# Altium PCB qav90.PcbDoc (part 4 of 7)
Units mm, origin at the board's own origin, x right, y up, seen from the top; angles counter-clockwise.
Board outline 90 x 90 mm, 3 copper layers (Top Layer, Mid-Layer 1, Bottom Layer); 214 components, 77 nets, 727 pads, 256 vias.
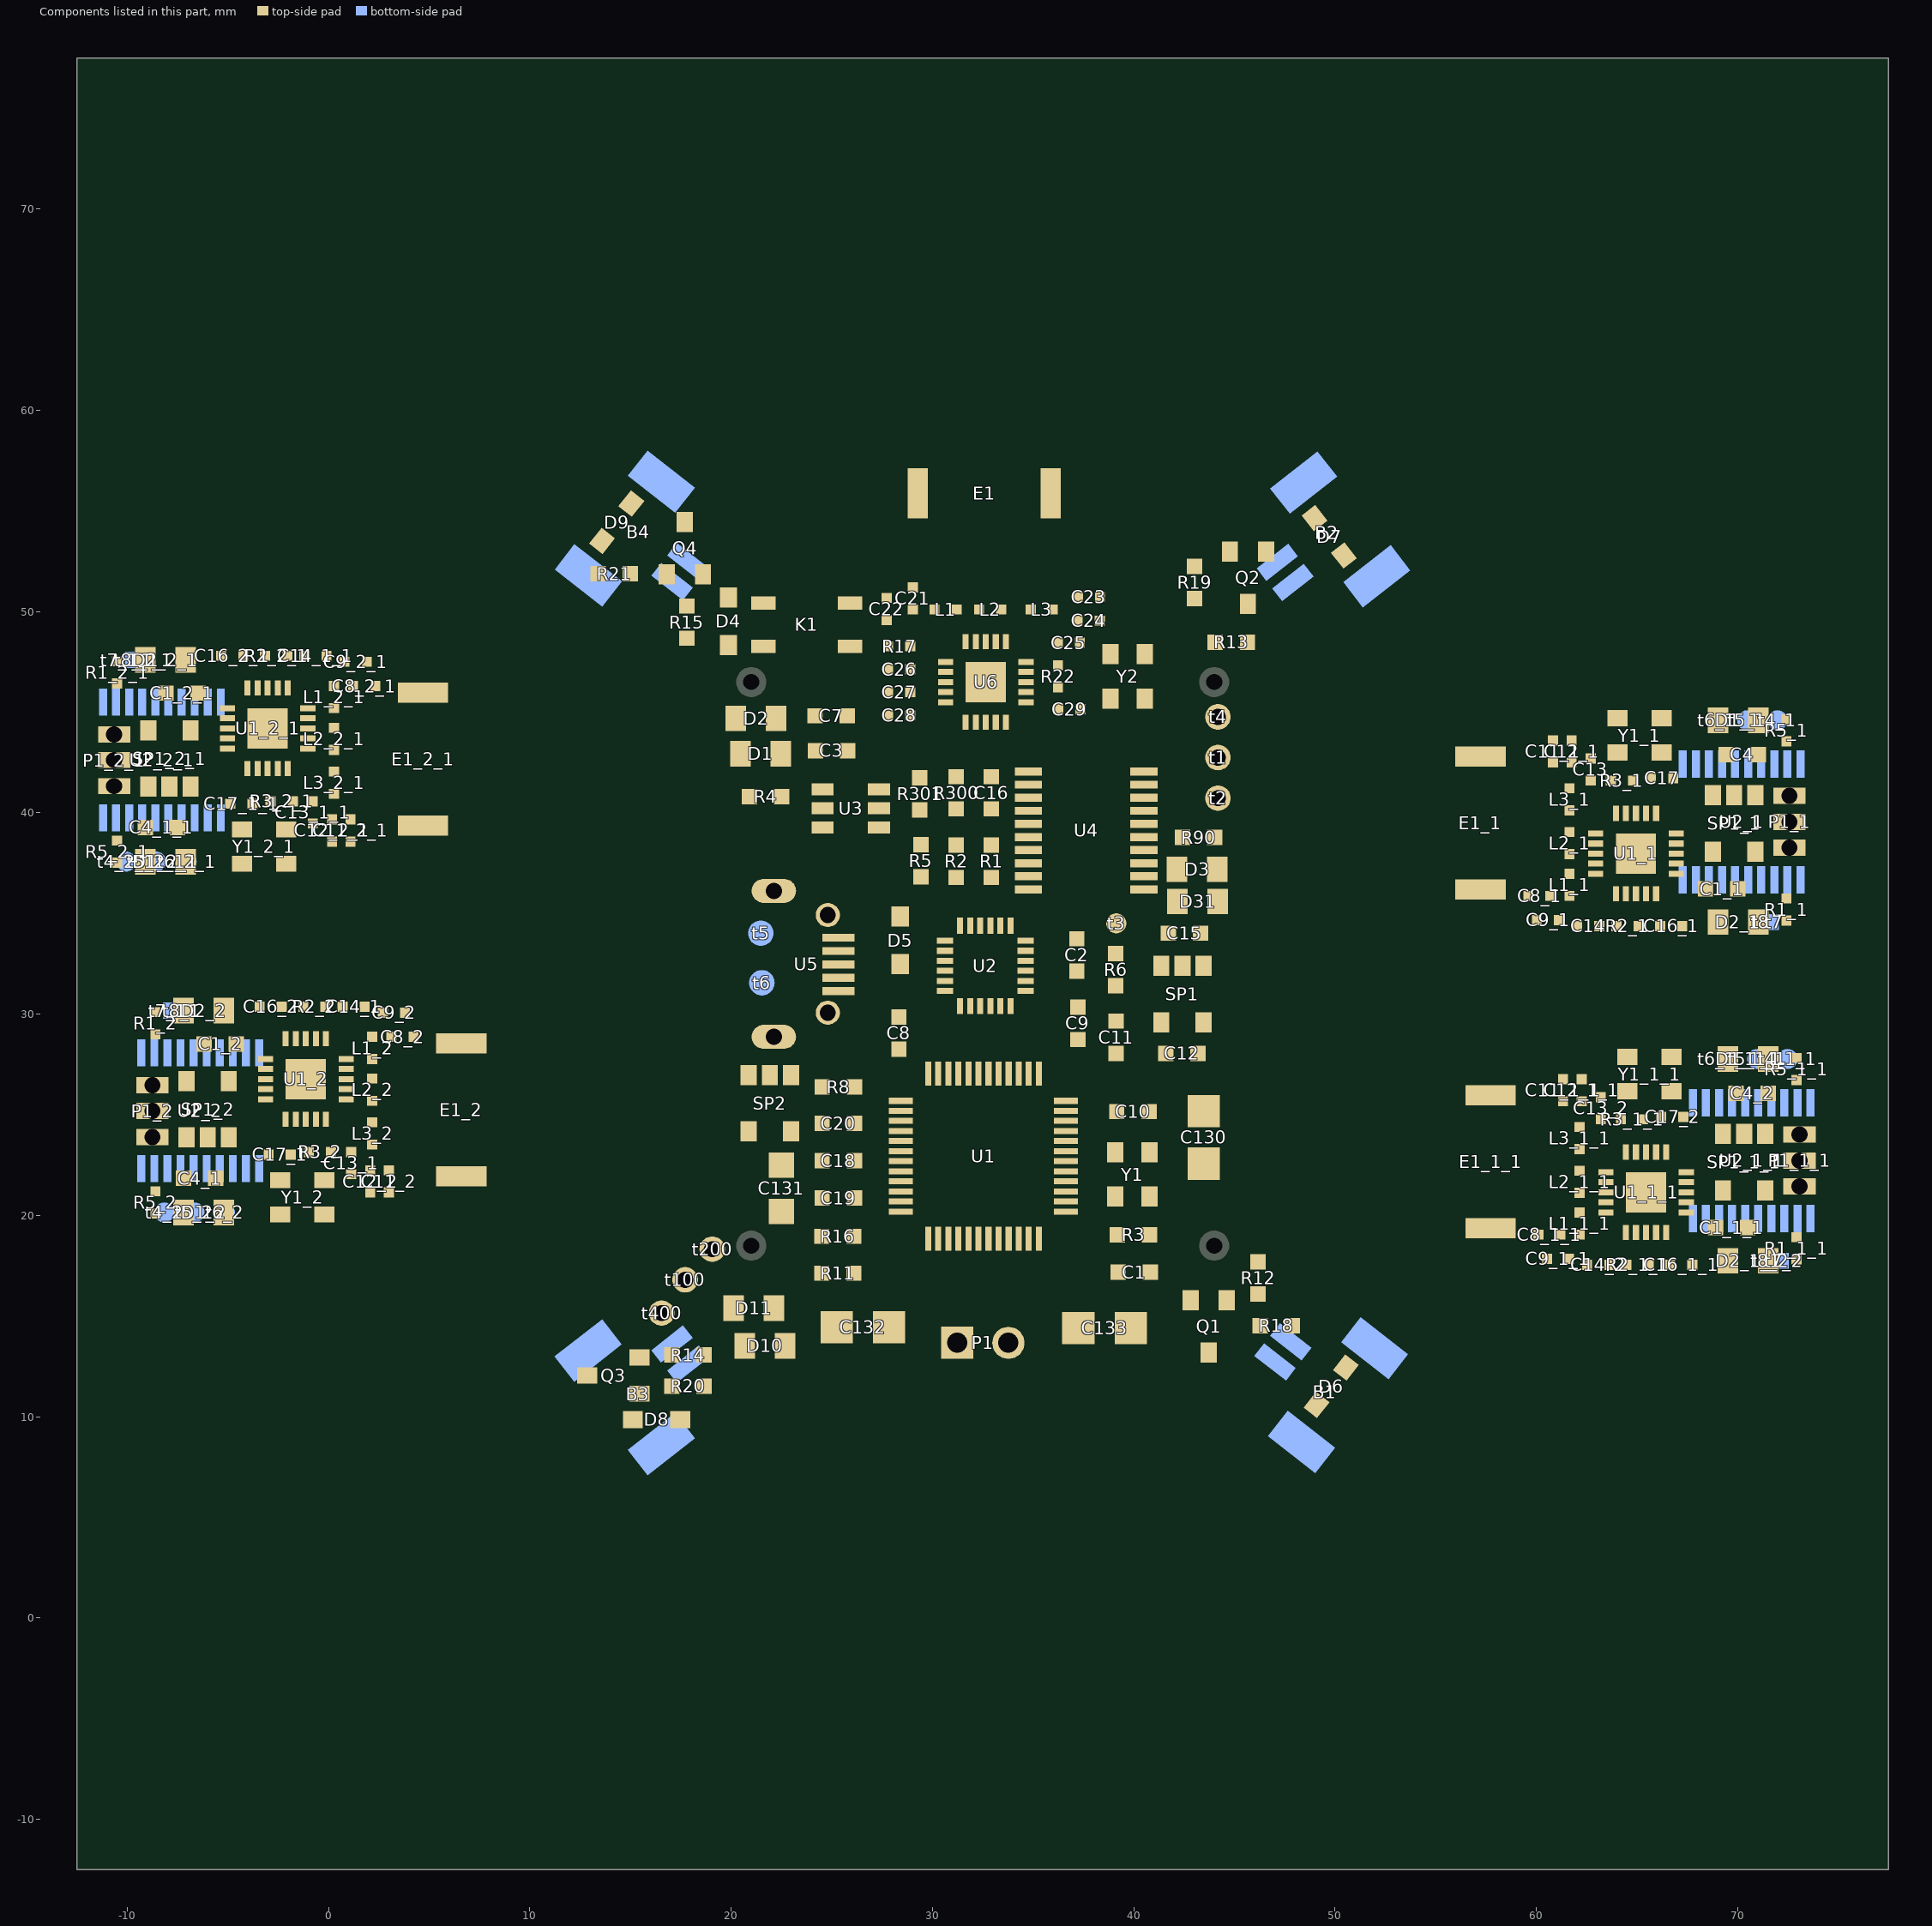
[diagram p4: the components of this part, seen from the top]

## Via types
v1: diameter 0.55, hole 0.25, Top Layer to Bottom Layer, tented both sides, 248 vias
v2: diameter 0.55, hole 0.25, Top Layer to Bottom Layer, 8 vias

## Nets (pads, with @x,y where several pads share a name; then routed paths per layer and width w, separated by ;. In a path a pad name is that pad's centre, name@x,y a point inside that pad or via, vN(x,y) a via of type N, cw(c..) or ccw(c..) an arc to the next point about the centre after c; other vN are vias at no path point) (continued)
copper on no net: (continued)
  Top Layer w0.254: v1@-11.134,46.971 -10.151,46.971 -9.78,46.6 -8.593,46.6 -8.582,46.61 -8.09,46.61 -7.1,47.6 ; -10.5,37.525 -9.425,37.525 -9.325,37.625 ; -10.5,38.625 -10.49,38.615 ; -10.5,47.525 -9.4,47.525 -9.325,47.6 ; v1@-9.234,29.546 -8.251,29.546 -7.88,29.175 -6.693,29.175 -6.682,29.185 -6.19,29.185 -5.2,30.175 ; -8.6,20.1 -7.525,20.1 -7.425,20.2 ; -8.6,21.2 -8.59,21.19 ; -8.6,30.1 -7.5,30.1 -7.425,30.175 ; -7.325,37.625 -6.875,37.175 v1@-5.95,37.175 ; v1(-6,40.575) -5.809,40.575 -5.2,41.184 -5.2,41.75 -5.021,41.929 -5.021,43.196 -5.025,43.2 ; v1@-5.875,41.425 -6.15,41.7 ; v1(-5.575,42.325) -5.679,42.429 -5.679,43.621 -5.6,43.7 -5.025,43.7 ; v1@-5.463,46.712 -5.815,46.36 -5.815,44.915 -5.6,44.7 -5.025,44.7 ; -5.425,20.2 -4.975,19.75 v1@-4.05,19.75 ; -5.025,44.2 -5.721,44.2 -6.15,43.771 -6.15,41.7 ; -5.025,45.2 -5.025,46.05 v1(-4.925,46.15) ; v1(-4.5,41.25) -4.475,41.274 -4.475,41.75 -4.025,42.2 ; -4.3,37.475 -3.15,38.625 -3.15,40.3 -2.875,40.575 ; -4.225,47.8 -4.225,47.75 -3.579,47.104 -3.579,46.254 -3.525,46.2 ; v1(-4.1,23.15) -3.909,23.15 -3.3,23.759 -3.3,24.325 -3.121,24.504 -3.121,25.771 -3.125,25.775 ; v1@-3.975,24 -4.25,24.275 -4.25,26.346 -3.821,26.775 -3.125,26.775 ; -3.775,40.45 -3.675,40.55 -2.9,40.55 -2.875,40.575 ; v1(-3.675,24.9) -3.779,25.004 -3.779,26.196 -3.7,26.275 -3.125,26.275 ; v1@-3.563,29.287 -3.915,28.935 -3.915,27.49 -3.7,27.275 -3.125,27.275 ; v1(-3.525,41.275) -3.525,42.2 ; v1(-3.15,47.775) v1@-3.15,47.8 ; -3.125,27.775 -3.125,28.625 v1(-3.025,28.725) ; -3.025,46.2 v1@-3.025,47 ; -2.994,40.179 cw(c-2.672,40.179) -2.819,40.466 ; v1(-2.6,23.825) -2.575,23.849 -2.575,24.325 -2.125,24.775 ; -2.525,42.2 -2.525,40.925 -2.875,40.575 ; -2.525,46.2 v1(-2.525,44.7) ; -2.4,20.05 -1.25,21.2 -1.25,22.875 -0.975,23.15 ; -2.325,30.375 -2.325,30.325 -1.679,29.679 -1.679,28.829 -1.625,28.775 ; -2.1,39.175 -1.775,39.5 -1.775,40.575 ; -2.05,47.8 -2.025,47.775 -2.025,46.2 ; -2.025,42.2 -2.025,40.825 -1.775,40.575 ; -1.875,23.025 -1.775,23.125 -1,23.125 -0.975,23.15 ; v1(-1.625,23.85) -1.625,24.775 ; v1(-1.25,30.35) v1@-1.25,30.375 ; -1.125,28.775 v1@-1.125,29.575 ; -1.094,22.754 cw(c-0.772,22.754) -0.919,23.041 ; -1.025,43.2 -1.025,41.9 -0.075,40.95 0.275,40.95 0.275,39.775 0.175,39.675 1.1,39.675 ; -1.025,43.7 -0.45,43.7 0.125,43.125 0.275,43.125 ; -1.025,44.2 0.25,44.2 0.275,44.225 ; -1.025,44.7 v1(-2.525,44.7) ; -0.775,40.575 -1.775,40.575 ; -0.625,24.775 -0.625,23.5 -0.975,23.15 ; -0.625,28.775 v1(-0.625,27.275) ; -0.2,21.75 0.125,22.075 0.125,23.15 ; -0.15,30.375 -0.125,30.35 -0.125,28.775 ; -0.125,24.775 -0.125,23.4 0.125,23.15 ; -0.089,41.146 ccw(c0.139,41.373) 0.237,41.067 ; 0.875,25.775 0.875,24.475 1.825,23.525 2.175,23.525 2.175,22.35 2.075,22.25 3,22.25 ; 0.875,26.275 1.45,26.275 2.025,25.7 2.175,25.7 ; 0.875,26.775 2.15,26.775 2.175,26.8 ; 0.875,27.275 v1(-0.625,27.275) ; 1.125,23.15 0.125,23.15 ; 1.811,23.721 ccw(c2.039,23.948) 2.137,23.642 ; 60.825,42.5 61.75,42.5 61.65,42.4 61.65,41.225 62,41.225 62.95,40.275 62.95,38.975 ; 61.325,25.675 62.25,25.675 62.15,25.575 62.15,24.4 62.5,24.4 63.45,23.45 63.45,22.15 ; 61.65,37.95 61.675,37.975 62.95,37.975 ; 61.65,39.05 61.8,39.05 62.375,38.475 62.95,38.475 ; 61.688,41.108 cw(c61.786,40.802) 62.014,41.029 ; 62.15,21.125 62.175,21.15 63.45,21.15 ; 62.15,22.225 62.3,22.225 62.875,21.65 63.45,21.65 ; 62.188,24.283 cw(c62.286,23.977) 62.514,24.204 ; 62.7,41.6 63.7,41.6 ; 62.95,37.475 v1(64.45,37.475) ; 63.2,24.775 64.2,24.775 ; 63.45,20.65 v1(64.95,20.65) ; 63.95,35.975 63.95,34.4 63.975,34.375 ; 63.95,39.975 63.95,41.35 63.7,41.6 ; 64.025,43 63.7,42.675 63.7,41.6 ; 64.45,19.15 64.45,17.575 64.475,17.55 ; 64.45,23.15 64.45,24.525 64.2,24.775 ; 64.45,35.975 v1(64.45,37.475) ; 64.45,39.975 64.45,41.25 64.8,41.6 ; 64.525,26.175 64.2,25.85 64.2,24.775 ; 64.744,41.709 ccw(c64.597,41.996) 64.919,41.996 ; 64.95,19.15 v1(64.95,20.65) ; 64.95,23.15 64.95,24.425 65.3,24.775 ; v1@64.95,35.175 64.95,35.975 ; v1@65.075,34.375 v1(65.075,34.4) ; 65.244,24.884 ccw(c65.097,25.171) 65.419,25.171 ; v1@65.45,18.35 65.45,19.15 ; 65.45,35.975 65.504,35.921 65.504,35.071 66.15,34.425 66.15,34.375 ; 65.45,39.975 v1(65.45,40.9) ; v1@65.575,17.55 v1(65.575,17.575) ; 65.7,41.725 65.6,41.625 64.825,41.625 64.8,41.6 ; 65.95,19.15 66.004,19.096 66.004,18.246 66.65,17.6 66.65,17.55 ; 65.95,23.15 v1(65.95,24.075) ; 65.95,39.975 66.4,40.425 66.4,40.901 v1(66.425,40.925) ; 66.2,24.9 66.1,24.8 65.325,24.8 65.3,24.775 ; 66.225,44.7 65.075,43.55 65.075,41.875 64.8,41.6 ; 66.45,23.15 66.9,23.6 66.9,24.076 v1(66.925,24.1) ; 66.725,27.875 65.575,26.725 65.575,25.05 65.3,24.775 ; v1(66.85,36.025) 66.95,36.125 66.95,36.975 ; 66.95,37.475 67.525,37.475 67.74,37.26 67.74,35.815 v1@67.388,35.463 ; 66.95,37.975 67.646,37.975 68.075,38.404 68.075,40.475 ; 66.95,38.475 67.525,38.475 67.604,38.554 67.604,39.746 v1(67.5,39.85) ; 66.95,38.975 66.946,38.979 66.946,40.246 67.125,40.425 67.125,40.991 67.734,41.6 v1@67.925,41.6 ; v1(67.35,19.2) 67.45,19.3 67.45,20.15 ; 67.45,20.65 68.025,20.65 68.24,20.435 68.24,18.99 v1@67.888,18.638 ; 67.45,21.15 68.146,21.15 68.575,21.579 68.575,23.65 ; 67.45,21.65 68.025,21.65 68.104,21.729 68.104,22.921 v1(68,23.025) ; 67.45,22.15 67.446,22.154 67.446,23.421 67.625,23.6 67.625,24.166 68.234,24.775 v1@68.425,24.775 ; v1@67.8,40.75 68.075,40.475 ; v1@68.3,23.925 68.575,23.65 ; 69.025,34.575 70.015,35.565 70.507,35.565 70.518,35.575 71.705,35.575 72.076,35.204 v1@73.059,35.204 ; 69.25,44.55 68.8,45 v1@67.875,45 ; 69.525,17.75 70.515,18.74 71.007,18.74 71.018,18.75 72.205,18.75 72.576,18.379 v1@73.559,18.379 ; 69.75,27.725 69.3,28.175 v1@68.375,28.175 ; 71.25,34.575 71.325,34.65 72.425,34.65 ; 71.25,44.55 71.35,44.65 72.425,44.65 ; 71.75,17.75 71.825,17.825 72.925,17.825 ; 71.75,27.725 71.85,27.825 72.925,27.825 ; 72.415,43.56 72.425,43.55 ; 72.915,26.735 72.925,26.725 ; v1@-11.045,46.845 cw(c-10.743,46.543) -10.743,46.971 ; v1@-11.045,46.845 cw(c-10.743,46.543) -10.743,46.971 ; v1@-11.045,46.845 cw(c-10.743,46.543) -10.743,46.971 ; v1@-11.045,47.055 ccw(c-10.843,47.257) -10.843,46.971 ; v1@-11.045,47.055 ccw(c-10.843,47.257) -10.843,46.971 ; v1@-11.045,47.055 ccw(c-10.843,47.257) -10.843,46.971 ; -10.413,37.438 cw(c-10.203,37.228) -10.203,37.525 ; -10.413,37.438 cw(c-10.203,37.228) -10.203,37.525 ; -10.413,37.438 cw(c-10.203,37.228) -10.203,37.525 ; -10.413,37.612 ccw(c-10.203,37.822) -10.203,37.525 ; -10.413,37.612 ccw(c-10.203,37.822) -10.203,37.525 ; -10.413,37.612 ccw(c-10.203,37.822) -10.203,37.525 ; -10.413,47.438 cw(c-10.203,47.228) -10.203,47.525 ; -10.413,47.438 cw(c-10.203,47.228) -10.203,47.525 ; -10.413,47.438 cw(c-10.203,47.228) -10.203,47.525 ; -10.413,47.612 ccw(c-10.203,47.822) -10.203,47.525 ; -10.413,47.612 ccw(c-10.203,47.822) -10.203,47.525 ; -10.413,47.612 ccw(c-10.203,47.822) -10.203,47.525 ; -10.145,47.525 cw(c-10.145,46.428) -9.369,47.204 ; -10.145,47.525 cw(c-10.145,46.428) -9.369,47.204 ; -10.145,47.525 cw(c-10.145,46.428) -9.369,47.204 ; -10.141,37.525 ccw(c-10.141,38.616) -9.369,37.844 ; -10.141,37.525 ccw(c-10.141,38.616) -9.369,37.844 ; -10.141,37.525 ccw(c-10.141,38.616) -9.369,37.844 ; -9.899,37.525 cw(c-9.899,36.776) -9.369,37.306 ; -9.899,37.525 cw(c-9.899,36.776) -9.369,37.306 ; -9.899,37.525 cw(c-9.899,36.776) -9.369,37.306 ; -9.894,47.525 ccw(c-9.894,48.267) -9.369,47.742 ; -9.894,47.525 ccw(c-9.894,48.267) -9.369,47.742 ; -9.894,47.525 ccw(c-9.894,48.267) -9.369,47.742 ; v1@-9.145,29.42 cw(c-8.843,29.118) -8.843,29.546 ; v1@-9.145,29.42 cw(c-8.843,29.118) -8.843,29.546 ; v1@-9.145,29.42 cw(c-8.843,29.118) -8.843,29.546 ; v1@-9.145,29.63 ccw(c-8.943,29.832) -8.943,29.546 ; v1@-9.145,29.63 ccw(c-8.943,29.832) -8.943,29.546 ; v1@-9.145,29.63 ccw(c-8.943,29.832) -8.943,29.546 ; -8.513,20.013 cw(c-8.303,19.803) -8.303,20.1 ; -8.513,20.013 cw(c-8.303,19.803) -8.303,20.1 ; -8.513,20.013 cw(c-8.303,19.803) -8.303,20.1 ; -8.513,20.187 ccw(c-8.303,20.397) -8.303,20.1 ; -8.513,20.187 ccw(c-8.303,20.397) -8.303,20.1 ; -8.513,20.187 ccw(c-8.303,20.397) -8.303,20.1 ; -8.513,30.013 cw(c-8.303,29.803) -8.303,30.1 ; -8.513,30.013 cw(c-8.303,29.803) -8.303,30.1 ; -8.513,30.013 cw(c-8.303,29.803) -8.303,30.1 ; -8.513,30.187 ccw(c-8.303,30.397) -8.303,30.1 ; -8.513,30.187 ccw(c-8.303,30.397) -8.303,30.1 ; -8.513,30.187 ccw(c-8.303,30.397) -8.303,30.1 ; -8.245,30.1 cw(c-8.245,29.003) -7.469,29.779 ; -8.245,30.1 cw(c-8.245,29.003) -7.469,29.779 ; -8.245,30.1 cw(c-8.245,29.003) -7.469,29.779 ; -8.241,20.1 ccw(c-8.241,21.191) -7.469,20.419 ; -8.241,20.1 ccw(c-8.241,21.191) -7.469,20.419 ; -8.241,20.1 ccw(c-8.241,21.191) -7.469,20.419 ; -7.999,20.1 cw(c-7.999,19.351) -7.469,19.881 ; -7.999,20.1 cw(c-7.999,19.351) -7.469,19.881 ; -7.999,20.1 cw(c-7.999,19.351) -7.469,19.881 ; -7.994,30.1 ccw(c-7.994,30.842) -7.469,30.317 ; -7.994,30.1 ccw(c-7.994,30.842) -7.469,30.317 ; -7.994,30.1 ccw(c-7.994,30.842) -7.469,30.317 ; -7.967,46.733 cw(c-7.1,45.866) -7.1,47.092 ; -7.967,46.733 cw(c-7.1,45.866) -7.1,47.092 ; -7.967,46.733 cw(c-7.1,45.866) -7.1,47.092 ; -7.661,47.039 ccw(c-8.094,47.473) -7.481,47.473 ; -7.661,47.039 ccw(c-8.094,47.473) -7.481,47.473 ; -7.661,47.039 ccw(c-8.094,47.473) -7.481,47.473 ; -7.534,47.166 cw(c-7.1,46.733) -7.1,47.346 ; -7.534,47.166 cw(c-7.1,46.733) -7.1,47.346 ; -7.534,47.166 cw(c-7.1,46.733) -7.1,47.346 ; -7.431,47.003 ccw(c-7.599,47.632) -6.979,47.434 ; -7.431,47.003 ccw(c-7.599,47.632) -6.979,47.434 ; -7.431,47.003 ccw(c-7.599,47.632) -6.979,47.434 ; -6.991,37.513 ccw(c-6.397,37.866) -6.397,37.175 ; -6.991,37.513 ccw(c-6.397,37.866) -6.397,37.175 ; -6.991,37.513 ccw(c-6.397,37.866) -6.397,37.175 ; -6.773,37.643 ccw(c-5.95,38.132) v1@-5.95,37.175 ; -6.773,37.643 ccw(c-5.95,38.132) v1@-5.95,37.175 ; -6.773,37.643 ccw(c-5.95,38.132) v1@-5.95,37.175 ; -6.307,37.175 cw(c-6.307,36.818) v1@-6.055,37.07 ; -6.307,37.175 ccw(c-6.307,37.532) v1@-6.055,37.28 ; -6.307,37.175 cw(c-6.307,36.818) v1@-6.055,37.07 ; -6.307,37.175 ccw(c-6.307,37.532) v1@-6.055,37.28 ; -6.307,37.175 cw(c-6.307,36.818) v1@-6.055,37.07 ; -6.307,37.175 ccw(c-6.307,37.532) v1@-6.055,37.28 ; -6.295,37.267 cw(c-6.388,36.922) v1@-6.078,37.101 ; -6.295,37.267 ccw(c-6.203,37.613) v1@-6.024,37.303 ; -6.295,37.267 cw(c-6.388,36.922) v1@-6.078,37.101 ; -6.295,37.267 ccw(c-6.203,37.613) v1@-6.024,37.303 ; -6.295,37.267 cw(c-6.388,36.922) v1@-6.078,37.101 ; -6.295,37.267 ccw(c-6.203,37.613) v1@-6.024,37.303 ; -6.295,37.267 cw(c-6.388,36.922) v1@-6.078,37.101 ; -6.295,37.267 ccw(c-6.203,37.613) v1@-6.024,37.303 ; -6.295,37.267 cw(c-6.388,36.922) v1@-6.078,37.101 ; -6.295,37.267 ccw(c-6.203,37.613) v1@-6.024,37.303 ; -6.295,37.267 cw(c-6.388,36.922) v1@-6.078,37.101 ; -6.295,37.267 ccw(c-6.203,37.613) v1@-6.024,37.303 ; -6.15,41.7 ccw(c-6.036,41.814) v1@-5.978,41.663 ; -6.15,41.7 ccw(c-6.036,41.814) v1@-5.978,41.663 ; -6.15,41.7 ccw(c-6.036,41.814) v1@-5.978,41.663 ; -6.15,41.812 ccw(c-5.638,41.812) v1@-6,41.45 ; -6.15,41.812 ccw(c-5.638,41.812) v1@-6,41.45 ; -6.15,41.812 ccw(c-5.638,41.812) v1@-6,41.45 ; -6.15,42.425 ccw(c-5.025,42.425) v1@-5.82,41.63 ; -6.15,42.425 ccw(c-5.025,42.425) v1@-5.82,41.63 ; -6.15,42.425 ccw(c-5.025,42.425) v1@-5.82,41.63 ; -6.07,42.063 cw(c-6.5,41.815) v1@-6.057,41.592 ; -6.07,42.063 cw(c-6.5,41.815) v1@-6.057,41.592 ; -6.07,42.063 cw(c-6.5,41.815) v1@-6.057,41.592 ; -6.067,29.308 cw(c-5.2,28.441) -5.2,29.667 ; -6.067,29.308 cw(c-5.2,28.441) -5.2,29.667 ; -6.067,29.308 cw(c-5.2,28.441) -5.2,29.667 ; v1@-6,40.723 ccw(c-6,41.54) -5.422,40.962 ; v1@-6,40.723 ccw(c-6,41.54) -5.422,40.962 ; v1@-6,40.723 ccw(c-6,41.54) -5.422,40.962 ; -5.761,29.614 ccw(c-6.194,30.048) -5.581,30.048 ; -5.761,29.614 ccw(c-6.194,30.048) -5.581,30.048 ; -5.761,29.614 ccw(c-6.194,30.048) -5.581,30.048 ; -5.745,46.43 ccw(c-6.041,46.725) v1@-5.623,46.725 ; -5.745,46.43 ccw(c-6.041,46.725) v1@-5.623,46.725 ; -5.745,46.43 ccw(c-6.041,46.725) v1@-5.623,46.725 ; -5.685,46.49 cw(c-5.475,46.28) v1@-5.475,46.577 ; -5.685,46.49 cw(c-5.475,46.28) v1@-5.475,46.577 ; -5.685,46.49 cw(c-5.475,46.28) v1@-5.475,46.577 ; -5.679,42.934 ccw(c-4.966,42.934) v1@-5.47,42.43 ; -5.679,42.934 ccw(c-4.966,42.934) v1@-5.47,42.43 ; -5.679,42.934 ccw(c-4.966,42.934) v1@-5.47,42.43 ; v1@-5.663,42.444 ccw(c-5.769,42.589) -5.614,42.678 ; v1@-5.663,42.444 ccw(c-5.769,42.589) -5.614,42.678 ; v1@-5.663,42.444 ccw(c-5.769,42.589) -5.614,42.678 ; -5.634,29.741 cw(c-5.2,29.308) -5.2,29.921 ; -5.634,29.741 cw(c-5.2,29.308) -5.2,29.921 ; -5.634,29.741 cw(c-5.2,29.308) -5.2,29.921 ; -5.531,29.578 ccw(c-5.699,30.207) -5.079,30.009 ; -5.531,29.578 ccw(c-5.699,30.207) -5.079,30.009 ; -5.531,29.578 ccw(c-5.699,30.207) -5.079,30.009 ; -5.091,20.088 ccw(c-4.497,20.441) -4.497,19.75 ; -5.091,20.088 ccw(c-4.497,20.441) -4.497,19.75 ; -5.091,20.088 ccw(c-4.497,20.441) -4.497,19.75 ; -5.025,45.551 cw(c-4.326,45.551) v1@-4.82,46.045 ; -5.025,45.551 cw(c-4.326,45.551) v1@-4.82,46.045 ; -5.025,45.551 cw(c-4.326,45.551) v1@-4.82,46.045 ; v1@-5.01,46.029 cw(c-5.108,45.889) -4.96,45.804 ; v1@-5.01,46.029 cw(c-5.108,45.889) -4.96,45.804 ; v1@-5.01,46.029 cw(c-5.108,45.889) -4.96,45.804 ; -4.873,20.218 ccw(c-4.05,20.707) v1@-4.05,19.75 ; -4.873,20.218 ccw(c-4.05,20.707) v1@-4.05,19.75 ; -4.873,20.218 ccw(c-4.05,20.707) v1@-4.05,19.75 ; v1@-4.604,41.354 ccw(c-4.916,41.666) -4.475,41.666 ; v1@-4.604,41.354 ccw(c-4.916,41.666) -4.475,41.666 ; v1@-4.604,41.354 ccw(c-4.916,41.666) -4.475,41.666 ; -4.475,41.547 ccw(c-4.202,41.547) v1@-4.395,41.354 ; -4.475,41.547 ccw(c-4.202,41.547) v1@-4.395,41.354 ; -4.475,41.547 ccw(c-4.202,41.547) v1@-4.395,41.354 ; -4.448,41.777 cw(c-4.025,41.353) -4.025,41.952 ; -4.448,41.777 cw(c-4.025,41.353) -4.025,41.952 ; -4.448,41.777 cw(c-4.025,41.353) -4.025,41.952 ; -4.407,19.75 ccw(c-4.407,20.107) v1@-4.155,19.855 ; -4.407,19.75 cw(c-4.407,19.393) v1@-4.155,19.645 ; -4.407,19.75 ccw(c-4.407,20.107) v1@-4.155,19.855 ; -4.407,19.75 cw(c-4.407,19.393) v1@-4.155,19.645 ; -4.407,19.75 ccw(c-4.407,20.107) v1@-4.155,19.855 ; -4.407,19.75 cw(c-4.407,19.393) v1@-4.155,19.645 ; -4.395,19.842 ccw(c-4.303,20.188) v1@-4.124,19.878 ; -4.395,19.842 cw(c-4.488,19.497) v1@-4.178,19.676 ; -4.395,19.842 ccw(c-4.303,20.188) v1@-4.124,19.878 ; -4.395,19.842 cw(c-4.488,19.497) v1@-4.178,19.676 ; -4.395,19.842 ccw(c-4.303,20.188) v1@-4.124,19.878 ; -4.395,19.842 cw(c-4.488,19.497) v1@-4.178,19.676 ; -4.395,19.842 ccw(c-4.303,20.188) v1@-4.124,19.878 ; -4.395,19.842 cw(c-4.488,19.497) v1@-4.178,19.676 ; -4.395,19.842 ccw(c-4.303,20.188) v1@-4.124,19.878 ; -4.395,19.842 cw(c-4.488,19.497) v1@-4.178,19.676 ; -4.395,19.842 ccw(c-4.303,20.188) v1@-4.124,19.878 ; -4.395,19.842 cw(c-4.488,19.497) v1@-4.178,19.676 ; -4.25,24.387 ccw(c-3.738,24.387) v1@-4.1,24.025 ; -4.25,24.387 ccw(c-3.738,24.387) v1@-4.1,24.025 ; -4.25,24.387 ccw(c-3.738,24.387) v1@-4.1,24.025 ; -4.25,25 ccw(c-3.125,25) v1@-3.92,24.205 ; -4.25,25 ccw(c-3.125,25) v1@-3.92,24.205 ; -4.25,25 ccw(c-3.125,25) v1@-3.92,24.205 ; -4.25,24.275 ccw(c-4.136,24.389) v1@-4.078,24.238 ; -4.25,24.275 ccw(c-4.136,24.389) v1@-4.078,24.238 ; -4.25,24.275 ccw(c-4.136,24.389) v1@-4.078,24.238 ; -4.206,37.493 ccw(c-4.396,38.069) -3.81,37.912 ; -4.206,37.493 ccw(c-4.396,38.069) -3.81,37.912 ; -4.206,37.493 ccw(c-4.396,38.069) -3.81,37.912 ; -4.2,37.748 ccw(c-4.2,38.166) -3.905,37.87 ; -4.2,37.748 ccw(c-4.2,38.166) -3.905,37.87 ; -4.2,37.748 ccw(c-4.2,38.166) -3.905,37.87 ; -4.17,24.638 cw(c-4.6,24.39) v1@-4.157,24.167 ; -4.17,24.638 cw(c-4.6,24.39) v1@-4.157,24.167 ; -4.17,24.638 cw(c-4.6,24.39) v1@-4.157,24.167 ; -4.102,47.8 ccw(c-3.684,47.8) -3.98,47.505 ; -4.102,47.8 ccw(c-3.684,47.8) -3.98,47.505 ; -4.102,47.8 ccw(c-3.684,47.8) -3.98,47.505 ; v1@-4.1,23.298 ccw(c-4.1,24.115) -3.522,23.537 ; v1@-4.1,23.298 ccw(c-4.1,24.115) -3.522,23.537 ; v1@-4.1,23.298 ccw(c-4.1,24.115) -3.522,23.537 ; -3.927,37.475 cw(c-3.027,37.475) -3.663,38.112 ; -3.927,37.475 cw(c-3.027,37.475) -3.663,38.112 ; -3.927,37.475 cw(c-3.027,37.475) -3.663,38.112 ; -3.845,29.005 ccw(c-4.141,29.3) v1@-3.723,29.3 ; -3.845,29.005 ccw(c-4.141,29.3) v1@-3.723,29.3 ; -3.845,29.005 ccw(c-4.141,29.3) v1@-3.723,29.3 ; -3.785,29.065 cw(c-3.575,28.855) v1@-3.575,29.152 ; -3.785,29.065 cw(c-3.575,28.855) v1@-3.575,29.152 ; -3.785,29.065 cw(c-3.575,28.855) v1@-3.575,29.152 ; -3.779,25.509 ccw(c-3.066,25.509) v1@-3.57,25.005 ; -3.779,25.509 ccw(c-3.066,25.509) v1@-3.57,25.005 ; -3.779,25.509 ccw(c-3.066,25.509) v1@-3.57,25.005 ; v1@-3.763,25.019 ccw(c-3.869,25.164) -3.714,25.253 ; v1@-3.763,25.019 ccw(c-3.869,25.164) -3.714,25.253 ; v1@-3.763,25.019 ccw(c-3.869,25.164) -3.714,25.253 ; -3.688,40.363 cw(c-3.237,39.912) -3.237,40.55 ; -3.688,40.363 cw(c-3.237,39.912) -3.237,40.55 ; -3.688,40.363 cw(c-3.237,39.912) -3.237,40.55 ; -3.682,40.531 ccw(c-3.549,40.647) -3.461,40.494 ; -3.682,40.531 ccw(c-3.549,40.647) -3.461,40.494 ; -3.682,40.531 ccw(c-3.549,40.647) -3.461,40.494 ; v1@-3.63,41.38 ccw(c-3.882,41.632) -3.525,41.632 ; v1@-3.63,41.38 ccw(c-3.882,41.632) -3.525,41.632 ; v1@-3.63,41.38 ccw(c-3.882,41.632) -3.525,41.632 ; -3.619,43.56 cw(c-4.879,42.2) -3.025,42.2 ; -3.619,43.56 cw(c-4.879,42.2) -3.025,42.2 ; -3.619,43.56 cw(c-4.879,42.2) -3.025,42.2 ; -3.579,46.612 ccw(c-3.338,46.612) -3.509,46.441 ; -3.579,46.612 ccw(c-3.338,46.612) -3.509,46.441 ; -3.579,46.612 ccw(c-3.338,46.612) -3.509,46.441 ; -3.525,41.632 ccw(c-3.168,41.632) v1@-3.42,41.38 ; -3.525,41.632 ccw(c-3.168,41.632) v1@-3.42,41.38 ; -3.525,41.632 ccw(c-3.168,41.632) v1@-3.42,41.38 ; v1@-3.446,43.746 cw(c-4.34,42.782) -3.025,42.782 ; v1@-3.446,43.746 cw(c-4.34,42.782) -3.025,42.782 ; v1@-3.446,43.746 cw(c-4.34,42.782) -3.025,42.782 ; -3.433,43.299 cw(c-3.038,43.565) v1@-3.407,43.867 ; -3.433,43.299 cw(c-3.038,43.565) v1@-3.407,43.867 ; -3.433,43.299 cw(c-3.038,43.565) v1@-3.407,43.867 ; -3.433,43.299 cw(c-3.038,43.565) v1@-3.407,43.867 ; -3.433,43.299 cw(c-3.038,43.565) v1@-3.407,43.867 ; -3.433,43.299 cw(c-3.038,43.565) v1@-3.407,43.867 ; v1@-3.429,43.695 cw(c-4.405,42.719) -3.025,42.719 ; v1@-3.429,43.695 cw(c-4.405,42.719) -3.025,42.719 ; v1@-3.429,43.695 cw(c-4.405,42.719) -3.025,42.719 ; v1@-3.326,43.652 cw(c-3.328,43.296) -3.02,43.473 ; v1@-3.326,43.652 cw(c-3.328,43.296) -3.02,43.473 ; v1@-3.326,43.652 cw(c-3.328,43.296) -3.02,43.473 ; v1@-3.26,43.884 cw(c-3.6,43.443) -3.048,43.514 ; v1@-3.26,43.884 cw(c-3.6,43.443) -3.048,43.514 ; v1@-3.26,43.884 cw(c-3.6,43.443) -3.048,43.514 ; v1@-3.26,43.884 cw(c-3.6,43.443) -3.048,43.514 ; v1@-3.26,43.884 cw(c-3.6,43.443) -3.048,43.514 ; v1@-3.26,43.884 cw(c-3.6,43.443) -3.048,43.514 ; v1@-3.25,43.875 cw(c-3.792,43.332) -3.025,43.332 ; v1@-3.25,43.875 cw(c-3.792,43.332) -3.025,43.332 ; v1@-3.25,43.875 cw(c-3.792,43.332) -3.025,43.332 ; -3.242,43.016 cw(c-2.762,43.339) v1@-3.21,43.706 ; -3.242,43.016 cw(c-2.762,43.339) v1@-3.21,43.706 ; -3.242,43.016 cw(c-2.762,43.339) v1@-3.21,43.706 ; -3.242,43.016 cw(c-2.762,43.339) v1@-3.21,43.706 ; -3.242,43.016 cw(c-2.762,43.339) v1@-3.21,43.706 ; -3.242,43.016 cw(c-2.762,43.339) v1@-3.21,43.706 ; -3.232,40.55 ccw(c-3.232,40.932) -2.962,40.662 ; -3.232,40.55 ccw(c-3.232,40.932) -2.962,40.662 ; -3.232,40.55 ccw(c-3.232,40.932) -2.962,40.662 ; v1@-3.22,43.904 ccw(c-2.787,44.338) v1@-2.787,43.725 ; v1@-3.22,43.904 ccw(c-2.787,44.338) v1@-2.787,43.725 ; v1@-3.22,43.904 ccw(c-2.787,44.338) v1@-2.787,43.725 ; v1@-3.184,43.754 ccw(c-2.582,43.56) -3.117,43.223 ; v1@-3.184,43.754 ccw(c-2.582,43.56) -3.117,43.223 ; v1@-3.184,43.754 ccw(c-2.582,43.56) -3.117,43.223 ; v1@-3.184,43.754 ccw(c-2.582,43.56) -3.117,43.223 ; v1@-3.184,43.754 ccw(c-2.582,43.56) -3.117,43.223 ; v1@-3.184,43.754 ccw(c-2.582,43.56) -3.117,43.223 ; v1@-3.183,43.757 ccw(c-2.447,43.533) -3.113,43.148 ; v1@-3.183,43.757 ccw(c-2.447,43.533) -3.113,43.148 ; v1@-3.183,43.757 ccw(c-2.447,43.533) -3.113,43.148 ; v1@-3.183,43.842 ccw(c-3.025,43.89) -3.025,43.725 ; v1@-3.183,43.842 ccw(c-3.025,43.89) -3.025,43.725 ; v1@-3.183,43.842 ccw(c-3.025,43.89) -3.025,43.725 ; -3.165,40.325 cw(c-2.937,40.193) -2.895,40.454 ; -3.165,40.325 cw(c-2.937,40.193) -2.895,40.454 ; -3.165,40.325 cw(c-2.937,40.193) -2.895,40.454 ; -3.15,39.614 cw(c-1.914,39.614) -2.788,40.488 ; -3.15,39.614 cw(c-1.914,39.614) -2.788,40.488 ; -3.15,39.614 cw(c-1.914,39.614) -2.788,40.488 ; -3.15,40.227 cw(c-2.527,40.227) -2.968,40.668 ; -3.15,40.227 cw(c-2.527,40.227) -2.968,40.668 ; -3.15,40.227 cw(c-2.527,40.227) -2.968,40.668 ; v1@-3.13,46.945 cw(c-3.382,46.693) -3.025,46.693 ; v1@-3.13,46.945 cw(c-3.382,46.693) -3.025,46.693 ; v1@-3.13,46.945 cw(c-3.382,46.693) -3.025,46.693 ; -3.125,28.126 cw(c-2.426,28.126) v1@-2.92,28.62 ; -3.125,28.126 cw(c-2.426,28.126) v1@-2.92,28.62 ; -3.125,28.126 cw(c-2.426,28.126) v1@-2.92,28.62 ; v1@-3.11,28.604 cw(c-3.208,28.464) -3.06,28.379 ; v1@-3.11,28.604 cw(c-3.208,28.464) -3.06,28.379 ; v1@-3.11,28.604 cw(c-3.208,28.464) -3.06,28.379 ; -3.085,40.365 cw(c-2.875,40.155) -2.875,40.452 ; -3.085,40.365 ccw(c-3.295,40.575) -2.998,40.575 ; -3.085,40.365 cw(c-2.875,40.155) -2.875,40.452 ; -3.085,40.365 ccw(c-3.295,40.575) -2.998,40.575 ; -3.085,40.365 cw(c-2.875,40.155) -2.875,40.452 ; -3.085,40.365 ccw(c-3.295,40.575) -2.998,40.575 ; -3.064,40.01 ccw(c-3.672,40.361) -2.994,40.543 ; -3.064,40.01 ccw(c-3.672,40.361) -2.994,40.543 ; -3.064,40.01 ccw(c-3.672,40.361) -2.994,40.543 ; -3.025,42.2 cw(c-1.171,42.2) v1@-2.431,43.56 ; -3.025,42.2 cw(c-1.171,42.2) v1@-2.431,43.56 ; -3.025,42.2 cw(c-1.171,42.2) v1@-2.431,43.56 ; -3.025,42.2 -3.025,43.725 ; -3.025,42.782 cw(c-1.71,42.782) v1@-2.604,43.746 ; -3.025,42.782 cw(c-1.71,42.782) v1@-2.604,43.746 ; -3.025,42.782 cw(c-1.71,42.782) v1@-2.604,43.746 ; -3.025,43.725 v1(-2.525,43.725) v1(-2.525,44.7) ; -3.025,46.693 cw(c-2.668,46.693) v1@-2.92,46.945 ; -3.025,46.693 cw(c-2.668,46.693) v1@-2.92,46.945 ; -3.025,46.693 cw(c-2.668,46.693) v1@-2.92,46.945 ; -2.98,43.777 ccw(c-2.867,44.196) v1@-2.612,43.845 ; -2.98,43.777 ccw(c-2.867,44.196) v1@-2.612,43.845 ; -2.98,43.777 ccw(c-2.867,44.196) v1@-2.612,43.845 ; -2.882,43.725 cw(c-2.882,43.368) v1@-2.63,43.62 ; -2.882,43.725 ccw(c-2.882,44.082) v1@-2.63,43.83 ; -2.882,43.725 cw(c-2.882,43.368) v1@-2.63,43.62 ; -2.882,43.725 ccw(c-2.882,44.082) v1@-2.63,43.83 ; -2.882,43.725 cw(c-2.882,43.368) v1@-2.63,43.62 ; -2.882,43.725 ccw(c-2.882,44.082) v1@-2.63,43.83 ; -2.882,43.304 cw(c-2.353,42.972) v1@-2.492,43.581 ; -2.882,43.304 cw(c-2.353,42.972) v1@-2.492,43.581 ; -2.882,43.304 cw(c-2.353,42.972) v1@-2.492,43.581 ; -2.882,43.304 cw(c-2.353,42.972) v1@-2.492,43.581 ; -2.882,43.304 cw(c-2.353,42.972) v1@-2.492,43.581 ; -2.882,43.304 cw(c-2.353,42.972) v1@-2.492,43.581 ; -2.875,40.698 ccw(c-2.875,40.995) -2.665,40.785 ; -2.875,40.698 ccw(c-2.875,40.995) -2.665,40.785 ; -2.875,40.698 ccw(c-2.875,40.995) -2.665,40.785 ; -2.864,43.384 ccw(c-3.032,43.702) v1@-2.673,43.718 ; -2.864,43.384 ccw(c-3.032,43.702) v1@-2.673,43.718 ; -2.864,43.384 ccw(c-3.032,43.702) v1@-2.673,43.718 ; -2.864,43.384 ccw(c-3.032,43.702) v1@-2.673,43.718 ; -2.798,42.992 ccw(c-3.58,43.498) v1@-2.67,43.694 ; -2.798,42.992 ccw(c-3.58,43.498) v1@-2.67,43.694 ; -2.798,42.992 ccw(c-3.58,43.498) v1@-2.67,43.694 ; -2.798,42.992 ccw(c-3.58,43.498) v1@-2.67,43.694 ; -2.798,42.992 ccw(c-3.58,43.498) v1@-2.67,43.694 ; -2.798,42.992 ccw(c-3.58,43.498) v1@-2.67,43.694 ; -2.752,40.575 cw(c-2.455,40.575) -2.665,40.785 ; -2.752,40.575 cw(c-2.455,40.575) -2.665,40.785 ; -2.752,40.575 cw(c-2.455,40.575) -2.665,40.785 ; v1@-2.704,23.929 ccw(c-3.016,24.241) -2.575,24.241 ; v1@-2.704,23.929 ccw(c-3.016,24.241) -2.575,24.241 ; v1@-2.704,23.929 ccw(c-3.016,24.241) -2.575,24.241 ; v1@-2.63,43.83 ccw(c-2.882,44.082) -2.525,44.082 ; v1@-2.63,43.83 ccw(c-2.882,44.082) -2.525,44.082 ; v1@-2.63,43.83 ccw(c-2.882,44.082) -2.525,44.082 ; v1@-2.63,44.595 cw(c-2.882,44.343) -2.525,44.343 ; v1@-2.63,44.595 cw(c-2.882,44.343) -2.525,44.343 ; v1@-2.63,44.595 cw(c-2.882,44.343) -2.525,44.343 ; v1@-2.63,44.805 ccw(c-2.882,45.057) -2.525,45.057 ; v1@-2.63,44.805 ccw(c-2.882,45.057) -2.525,45.057 ; v1@-2.63,44.805 ccw(c-2.882,45.057) -2.525,45.057 ; -2.575,24.122 ccw(c-2.302,24.122) v1@-2.495,23.929 ; -2.575,24.122 ccw(c-2.302,24.122) v1@-2.495,23.929 ; -2.575,24.122 ccw(c-2.302,24.122) v1@-2.495,23.929 ; -2.548,24.352 cw(c-2.125,23.928) -2.125,24.527 ; -2.548,24.352 cw(c-2.125,23.928) -2.125,24.527 ; -2.548,24.352 cw(c-2.125,23.928) -2.125,24.527 ; -2.525,44.082 ccw(c-2.168,44.082) v1@-2.42,43.83 ; -2.525,44.082 ccw(c-2.168,44.082) v1@-2.42,43.83 ; -2.525,44.082 ccw(c-2.168,44.082) v1@-2.42,43.83 ; -2.525,44.343 cw(c-2.168,44.343) v1@-2.42,44.595 ; -2.525,44.343 cw(c-2.168,44.343) v1@-2.42,44.595 ; -2.525,44.343 cw(c-2.168,44.343) v1@-2.42,44.595 ; -2.525,45.057 ccw(c-2.168,45.057) v1@-2.42,44.805 ; -2.525,45.057 ccw(c-2.168,45.057) v1@-2.42,44.805 ; -2.525,45.057 ccw(c-2.168,45.057) v1@-2.42,44.805 ; v1@-2.42,44.595 cw(c-2.168,44.343) -2.168,44.7 ; v1@-2.42,44.595 cw(c-2.168,44.343) -2.168,44.7 ; v1@-2.42,44.595 cw(c-2.168,44.343) -2.168,44.7 ; v1@-2.42,44.805 ccw(c-2.168,45.057) -2.168,44.7 ; v1@-2.42,44.805 ccw(c-2.168,45.057) -2.168,44.7 ; v1@-2.42,44.805 ccw(c-2.168,45.057) -2.168,44.7 ; -2.306,20.068 ccw(c-2.496,20.644) -1.91,20.487 ; -2.306,20.068 ccw(c-2.496,20.644) -1.91,20.487 ; -2.306,20.068 ccw(c-2.496,20.644) -1.91,20.487 ; -2.3,20.323 ccw(c-2.3,20.741) -2.005,20.445 ; -2.3,20.323 ccw(c-2.3,20.741) -2.005,20.445 ; -2.3,20.323 ccw(c-2.3,20.741) -2.005,20.445 ; -2.202,30.375 ccw(c-1.784,30.375) -2.08,30.08 ; -2.202,30.375 ccw(c-1.784,30.375) -2.08,30.08 ; -2.202,30.375 ccw(c-1.784,30.375) -2.08,30.08 ; -2.193,39.368 ccw(c-3.202,40.377) -1.775,40.377 ; -2.193,39.368 ccw(c-3.202,40.377) -1.775,40.377 ; -2.193,39.368 ccw(c-3.202,40.377) -1.775,40.377 ; -2.137,47.713 cw(c-2.407,47.443) -2.025,47.443 ; -2.137,47.713 cw(c-2.407,47.443) -2.025,47.443 ; -2.137,47.713 cw(c-2.407,47.443) -2.025,47.443 ; -2.055,39.607 ccw(c-1.766,39.439) -1.987,39.189 ; -2.055,39.607 ccw(c-1.766,39.439) -1.987,39.189 ; -2.055,39.607 ccw(c-1.766,39.439) -1.987,39.189 ; -2.027,20.05 cw(c-1.127,20.05) -1.763,20.687 ; -2.027,20.05 cw(c-1.127,20.05) -1.763,20.687 ; -2.027,20.05 cw(c-1.127,20.05) -1.763,20.687 ; -2.025,40.862 ccw(c-1.488,40.862) -1.868,40.482 ; -2.025,40.862 ccw(c-1.488,40.862) -1.868,40.482 ; -2.025,40.862 ccw(c-1.488,40.862) -1.868,40.482 ; -2.025,41.476 ccw(c-0.874,41.476) -1.688,40.662 ; -2.025,41.476 ccw(c-0.874,41.476) -1.688,40.662 ; -2.025,41.476 ccw(c-0.874,41.476) -1.688,40.662 ; -2.013,39.188 ccw(c-2.589,39.764) -1.775,39.764 ; -2.013,39.188 ccw(c-2.589,39.764) -1.775,39.764 ; -2.013,39.188 ccw(c-2.589,39.764) -1.775,39.764 ; -1.951,41.118 cw(c-2.509,40.797) -1.893,40.611 ; -1.951,41.118 cw(c-2.509,40.797) -1.893,40.611 ; -1.951,41.118 cw(c-2.509,40.797) -1.893,40.611 ; -1.9,39.876 ccw(c-1.555,39.677) -1.819,39.379 ; -1.9,39.876 ccw(c-1.555,39.677) -1.819,39.379 ; -1.9,39.876 ccw(c-1.555,39.677) -1.819,39.379 ; -1.882,40.513 cw(c-2.29,40.278) -1.834,40.156 ; -1.882,40.513 cw(c-2.29,40.278) -1.834,40.156 ; -1.882,40.513 cw(c-2.29,40.278) -1.834,40.156 ; -1.862,40.488 cw(c-2.072,40.278) -1.775,40.278 ; -1.862,40.488 cw(c-2.072,40.278) -1.775,40.278 ; -1.862,40.488 cw(c-2.072,40.278) -1.775,40.278 ; -1.788,22.938 cw(c-1.337,22.487) -1.337,23.125 ; -1.788,22.938 cw(c-1.337,22.487) -1.337,23.125 ; -1.788,22.938 cw(c-1.337,22.487) -1.337,23.125 ; -1.782,23.106 ccw(c-1.649,23.222) -1.561,23.069 ; -1.782,23.106 ccw(c-1.649,23.222) -1.561,23.069 ; -1.782,23.106 ccw(c-1.649,23.222) -1.561,23.069 ; -1.775,40.278 cw(c-1.478,40.278) -1.688,40.488 ; -1.775,40.278 cw(c-1.478,40.278) -1.688,40.488 ; -1.775,40.278 cw(c-1.478,40.278) -1.688,40.488 ; v1@-1.73,23.955 ccw(c-1.982,24.207) -1.625,24.207 ; v1@-1.73,23.955 ccw(c-1.982,24.207) -1.625,24.207 ; v1@-1.73,23.955 ccw(c-1.982,24.207) -1.625,24.207 ; -1.719,26.135 cw(c-2.979,24.775) -1.125,24.775 ; -1.719,26.135 cw(c-2.979,24.775) -1.125,24.775 ; -1.719,26.135 cw(c-2.979,24.775) -1.125,24.775 ; -1.688,40.488 cw(c-1.478,40.278) -1.478,40.575 ; -1.688,40.488 cw(c-1.478,40.278) -1.478,40.575 ; -1.688,40.488 cw(c-1.478,40.278) -1.478,40.575 ; -1.688,40.662 ccw(c-1.478,40.872) -1.478,40.575 ; -1.688,40.662 ccw(c-1.478,40.872) -1.478,40.575 ; -1.688,40.662 ccw(c-1.478,40.872) -1.478,40.575 ; -1.679,29.187 ccw(c-1.438,29.187) -1.609,29.016 ; -1.679,29.187 ccw(c-1.438,29.187) -1.609,29.016 ; -1.679,29.187 ccw(c-1.438,29.187) -1.609,29.016 ; -1.625,24.207 ccw(c-1.268,24.207) v1@-1.52,23.955 ; -1.625,24.207 ccw(c-1.268,24.207) v1@-1.52,23.955 ; -1.625,24.207 ccw(c-1.268,24.207) v1@-1.52,23.955 ; v1@-1.546,26.321 cw(c-2.44,25.357) -1.125,25.357 ; v1@-1.546,26.321 cw(c-2.44,25.357) -1.125,25.357 ; v1@-1.546,26.321 cw(c-2.44,25.357) -1.125,25.357 ; -1.533,25.874 cw(c-1.138,26.14) v1@-1.507,26.442 ; -1.533,25.874 cw(c-1.138,26.14) v1@-1.507,26.442 ; -1.533,25.874 cw(c-1.138,26.14) v1@-1.507,26.442 ; -1.533,25.874 cw(c-1.138,26.14) v1@-1.507,26.442 ; -1.533,25.874 cw(c-1.138,26.14) v1@-1.507,26.442 ; -1.533,25.874 cw(c-1.138,26.14) v1@-1.507,26.442 ; v1@-1.529,26.27 cw(c-2.505,25.294) -1.125,25.294 ; v1@-1.529,26.27 cw(c-2.505,25.294) -1.125,25.294 ; v1@-1.529,26.27 cw(c-2.505,25.294) -1.125,25.294 ; v1@-1.426,26.227 cw(c-1.428,25.871) -1.12,26.048 ; v1@-1.426,26.227 cw(c-1.428,25.871) -1.12,26.048 ; v1@-1.426,26.227 cw(c-1.428,25.871) -1.12,26.048 ; v1@-1.36,26.459 cw(c-1.7,26.018) -1.148,26.089 ; v1@-1.36,26.459 cw(c-1.7,26.018) -1.148,26.089 ; v1@-1.36,26.459 cw(c-1.7,26.018) -1.148,26.089 ; v1@-1.36,26.459 cw(c-1.7,26.018) -1.148,26.089 ; v1@-1.36,26.459 cw(c-1.7,26.018) -1.148,26.089 ; v1@-1.36,26.459 cw(c-1.7,26.018) -1.148,26.089 ; v1@-1.35,26.45 cw(c-1.892,25.907) -1.125,25.907 ; v1@-1.35,26.45 cw(c-1.892,25.907) -1.125,25.907 ; v1@-1.35,26.45 cw(c-1.892,25.907) -1.125,25.907 ; -1.342,25.591 cw(c-0.862,25.914) v1@-1.31,26.281 ; -1.342,25.591 cw(c-0.862,25.914) v1@-1.31,26.281 ; -1.342,25.591 cw(c-0.862,25.914) v1@-1.31,26.281 ; -1.342,25.591 cw(c-0.862,25.914) v1@-1.31,26.281 ; -1.342,25.591 cw(c-0.862,25.914) v1@-1.31,26.281 ; -1.342,25.591 cw(c-0.862,25.914) v1@-1.31,26.281 ; -1.332,23.125 ccw(c-1.332,23.507) -1.062,23.237 ; -1.332,23.125 ccw(c-1.332,23.507) -1.062,23.237 ; -1.332,23.125 ccw(c-1.332,23.507) -1.062,23.237 ; v1@-1.32,26.479 ccw(c-0.887,26.913) v1@-0.887,26.3 ; v1@-1.32,26.479 ccw(c-0.887,26.913) v1@-0.887,26.3 ; v1@-1.32,26.479 ccw(c-0.887,26.913) v1@-0.887,26.3 ; v1@-1.284,26.329 ccw(c-0.682,26.135) -1.217,25.798 ; v1@-1.284,26.329 ccw(c-0.682,26.135) -1.217,25.798 ; v1@-1.284,26.329 ccw(c-0.682,26.135) -1.217,25.798 ; v1@-1.284,26.329 ccw(c-0.682,26.135) -1.217,25.798 ; v1@-1.284,26.329 ccw(c-0.682,26.135) -1.217,25.798 ; v1@-1.284,26.329 ccw(c-0.682,26.135) -1.217,25.798 ; v1@-1.283,26.332 ccw(c-0.547,26.108) -1.213,25.723 ; v1@-1.283,26.332 ccw(c-0.547,26.108) -1.213,25.723 ; v1@-1.283,26.332 ccw(c-0.547,26.108) -1.213,25.723 ; v1@-1.283,26.417 ccw(c-1.125,26.465) -1.125,26.3 ; v1@-1.283,26.417 ccw(c-1.125,26.465) -1.125,26.3 ; v1@-1.283,26.417 ccw(c-1.125,26.465) -1.125,26.3 ; -1.265,22.9 cw(c-1.037,22.768) -0.995,23.029 ; -1.265,22.9 cw(c-1.037,22.768) -0.995,23.029 ; -1.265,22.9 cw(c-1.037,22.768) -0.995,23.029 ; -1.25,22.189 cw(c-0.014,22.189) -0.888,23.063 ; -1.25,22.189 cw(c-0.014,22.189) -0.888,23.063 ; -1.25,22.189 cw(c-0.014,22.189) -0.888,23.063 ; -1.25,22.802 cw(c-0.627,22.802) -1.068,23.243 ; -1.25,22.802 cw(c-0.627,22.802) -1.068,23.243 ; -1.25,22.802 cw(c-0.627,22.802) -1.068,23.243 ; v1@-1.23,29.52 cw(c-1.482,29.268) -1.125,29.268 ; v1@-1.23,29.52 cw(c-1.482,29.268) -1.125,29.268 ; v1@-1.23,29.52 cw(c-1.482,29.268) -1.125,29.268 ; -1.185,22.94 ccw(c-1.395,23.15) -1.098,23.15 ; -1.185,22.94 cw(c-0.975,22.73) -0.975,23.027 ; -1.185,22.94 ccw(c-1.395,23.15) -1.098,23.15 ; -1.185,22.94 cw(c-0.975,22.73) -0.975,23.027 ; -1.185,22.94 ccw(c-1.395,23.15) -1.098,23.15 ; -1.185,22.94 cw(c-0.975,22.73) -0.975,23.027 ; -1.164,22.585 ccw(c-1.772,22.936) -1.094,23.118 ; -1.164,22.585 ccw(c-1.772,22.936) -1.094,23.118 ; -1.164,22.585 ccw(c-1.772,22.936) -1.094,23.118 ; -1.125,24.775 cw(c0.729,24.775) v1@-0.531,26.135 ; -1.125,24.775 cw(c0.729,24.775) v1@-0.531,26.135 ; -1.125,24.775 cw(c0.729,24.775) v1@-0.531,26.135 ; -1.125,24.775 -1.125,26.3 ; -1.125,25.357 cw(c0.19,25.357) v1@-0.704,26.321 ; -1.125,25.357 cw(c0.19,25.357) v1@-0.704,26.321 ; -1.125,25.357 cw(c0.19,25.357) v1@-0.704,26.321 ; -1.125,26.3 v1(-0.625,26.3) v1(-0.625,27.275) ; -1.125,29.268 cw(c-0.768,29.268) v1@-1.02,29.52 ; -1.125,29.268 cw(c-0.768,29.268) v1@-1.02,29.52 ; -1.125,29.268 cw(c-0.768,29.268) v1@-1.02,29.52 ; -1.08,26.352 ccw(c-0.967,26.771) v1@-0.712,26.42 ; -1.08,26.352 ccw(c-0.967,26.771) v1@-0.712,26.42 ; -1.08,26.352 ccw(c-0.967,26.771) v1@-0.712,26.42 ; -1.072,40.575 cw(c-1.072,40.278) -0.862,40.488 ; -1.072,40.575 ccw(c-1.072,40.872) -0.862,40.662 ; -1.072,40.575 cw(c-1.072,40.278) -0.862,40.488 ; -1.072,40.575 ccw(c-1.072,40.872) -0.862,40.662 ; -1.072,40.575 cw(c-1.072,40.278) -0.862,40.488 ; -1.072,40.575 ccw(c-1.072,40.872) -0.862,40.662 ; -0.982,26.3 ccw(c-0.982,26.657) v1@-0.73,26.405 ; -0.982,26.3 cw(c-0.982,25.943) v1@-0.73,26.195 ; -0.982,26.3 ccw(c-0.982,26.657) v1@-0.73,26.405 ; -0.982,26.3 cw(c-0.982,25.943) v1@-0.73,26.195 ; -0.982,26.3 ccw(c-0.982,26.657) v1@-0.73,26.405 ; -0.982,26.3 cw(c-0.982,25.943) v1@-0.73,26.195 ; -0.982,25.879 cw(c-0.453,25.547) v1@-0.592,26.156 ; -0.982,25.879 cw(c-0.453,25.547) v1@-0.592,26.156 ; -0.982,25.879 cw(c-0.453,25.547) v1@-0.592,26.156 ; -0.982,25.879 cw(c-0.453,25.547) v1@-0.592,26.156 ; -0.982,25.879 cw(c-0.453,25.547) v1@-0.592,26.156 ; -0.982,25.879 cw(c-0.453,25.547) v1@-0.592,26.156 ; -0.975,23.273 ccw(c-0.975,23.57) -0.765,23.36 ; -0.975,23.273 ccw(c-0.975,23.57) -0.765,23.36 ; -0.975,23.273 ccw(c-0.975,23.57) -0.765,23.36 ; -0.964,25.959 ccw(c-1.132,26.277) v1@-0.773,26.293 ; -0.964,25.959 ccw(c-1.132,26.277) v1@-0.773,26.293 ; -0.964,25.959 ccw(c-1.132,26.277) v1@-0.773,26.293 ; -0.964,25.959 ccw(c-1.132,26.277) v1@-0.773,26.293 ; -0.898,25.567 ccw(c-1.68,26.073) v1@-0.77,26.269 ; -0.898,25.567 ccw(c-1.68,26.073) v1@-0.77,26.269 ; -0.898,25.567 ccw(c-1.68,26.073) v1@-0.77,26.269 ; -0.898,25.567 ccw(c-1.68,26.073) v1@-0.77,26.269 ; -0.898,25.567 ccw(c-1.68,26.073) v1@-0.77,26.269 ; -0.898,25.567 ccw(c-1.68,26.073) v1@-0.77,26.269 ; -0.852,23.15 cw(c-0.555,23.15) -0.765,23.36 ; -0.852,23.15 cw(c-0.555,23.15) -0.765,23.36 ; -0.852,23.15 cw(c-0.555,23.15) -0.765,23.36 ; v1@-0.73,26.405 ccw(c-0.982,26.657) -0.625,26.657 ; v1@-0.73,26.405 ccw(c-0.982,26.657) -0.625,26.657 ; v1@-0.73,26.405 ccw(c-0.982,26.657) -0.625,26.657 ; v1@-0.73,27.17 cw(c-0.982,26.918) -0.625,26.918 ; v1@-0.73,27.17 cw(c-0.982,26.918) -0.625,26.918 ; v1@-0.73,27.17 cw(c-0.982,26.918) -0.625,26.918 ; v1@-0.73,27.38 ccw(c-0.982,27.632) -0.625,27.632 ; v1@-0.73,27.38 ccw(c-0.982,27.632) -0.625,27.632 ; v1@-0.73,27.38 ccw(c-0.982,27.632) -0.625,27.632 ; -0.625,26.657 ccw(c-0.268,26.657) v1@-0.52,26.405 ; -0.625,26.657 ccw(c-0.268,26.657) v1@-0.52,26.405 ; -0.625,26.657 ccw(c-0.268,26.657) v1@-0.52,26.405 ; -0.625,26.918 cw(c-0.268,26.918) v1@-0.52,27.17 ; -0.625,26.918 cw(c-0.268,26.918) v1@-0.52,27.17 ; -0.625,26.918 cw(c-0.268,26.918) v1@-0.52,27.17 ; -0.625,27.632 ccw(c-0.268,27.632) v1@-0.52,27.38 ; -0.625,27.632 ccw(c-0.268,27.632) v1@-0.52,27.38 ; -0.625,27.632 ccw(c-0.268,27.632) v1@-0.52,27.38 ; -0.532,41.407 ccw(c0.275,42.215) 0.275,41.073 ; -0.532,41.407 ccw(c0.275,42.215) 0.275,41.073 ; -0.532,41.407 ccw(c0.275,42.215) 0.275,41.073 ; v1@-0.52,27.17 cw(c-0.268,26.918) -0.268,27.275 ; v1@-0.52,27.17 cw(c-0.268,26.918) -0.268,27.275 ; v1@-0.52,27.17 cw(c-0.268,26.918) -0.268,27.275 ; v1@-0.52,27.38 ccw(c-0.268,27.632) -0.268,27.275 ; v1@-0.52,27.38 ccw(c-0.268,27.632) -0.268,27.275 ; v1@-0.52,27.38 ccw(c-0.268,27.632) -0.268,27.275 ; -0.293,21.943 ccw(c-1.302,22.952) 0.125,22.952 ; -0.293,21.943 ccw(c-1.302,22.952) 0.125,22.952 ; -0.293,21.943 ccw(c-1.302,22.952) 0.125,22.952 ; -0.258,41.216 cw(c-0.44,40.537) 0.168,40.889 ; -0.258,41.216 cw(c-0.44,40.537) 0.168,40.889 ; -0.258,41.216 cw(c-0.44,40.537) 0.168,40.889 ; -0.237,30.288 cw(c-0.507,30.018) -0.125,30.018 ; -0.237,30.288 cw(c-0.507,30.018) -0.125,30.018 ; -0.237,30.288 cw(c-0.507,30.018) -0.125,30.018 ; -0.191,43.441 ccw(c0.275,43.907) 0.275,43.248 ; -0.191,43.441 ccw(c0.275,43.907) 0.275,43.248 ; -0.191,43.441 ccw(c0.275,43.907) 0.275,43.248 ; -0.155,22.182 ccw(c0.134,22.014) -0.087,21.764 ; -0.155,22.182 ccw(c0.134,22.014) -0.087,21.764 ; -0.155,22.182 ccw(c0.134,22.014) -0.087,21.764 ; -0.125,23.437 ccw(c0.412,23.437) 0.032,23.057 ; -0.125,23.437 ccw(c0.412,23.437) 0.032,23.057 ; -0.125,23.437 ccw(c0.412,23.437) 0.032,23.057 ; -0.125,24.051 ccw(c1.026,24.051) 0.212,23.237 ; -0.125,24.051 ccw(c1.026,24.051) 0.212,23.237 ; -0.125,24.051 ccw(c1.026,24.051) 0.212,23.237 ; -0.113,21.763 ccw(c-0.689,22.339) 0.125,22.339 ; -0.113,21.763 ccw(c-0.689,22.339) 0.125,22.339 ; -0.113,21.763 ccw(c-0.689,22.339) 0.125,22.339 ; -0.099,40.974 ccw(c0.275,41.348) 0.275,40.819 ; -0.099,40.974 ccw(c0.275,41.348) 0.275,40.819 ; -0.099,40.974 ccw(c0.275,41.348) 0.275,40.819 ; -0.082,44.2 ccw(c-0.082,44.582) 0.188,44.312 ; -0.082,44.2 ccw(c-0.082,44.582) 0.188,44.312 ; -0.082,44.2 ccw(c-0.082,44.582) 0.188,44.312 ; -0.051,23.693 cw(c-0.609,23.372) 0.007,23.186 ; -0.051,23.693 cw(c-0.609,23.372) 0.007,23.186 ; -0.051,23.693 cw(c-0.609,23.372) 0.007,23.186 ; -0.022,40.95 cw(c-0.022,40.653) 0.188,40.863 ; -0.022,40.95 ccw(c-0.022,41.247) 0.188,41.037 ; -0.022,40.95 cw(c-0.022,40.653) 0.188,40.863 ; -0.022,40.95 ccw(c-0.022,41.247) 0.188,41.037 ; -0.022,40.95 cw(c-0.022,40.653) 0.188,40.863 ; -0.022,40.95 ccw(c-0.022,41.247) 0.188,41.037 ; 0,22.451 ccw(c0.345,22.252) 0.081,21.954 ; 0,22.451 ccw(c0.345,22.252) 0.081,21.954 ; 0,22.451 ccw(c0.345,22.252) 0.081,21.954 ; 0.018,23.088 cw(c-0.39,22.853) 0.066,22.731 ; 0.018,23.088 cw(c-0.39,22.853) 0.066,22.731 ; 0.018,23.088 cw(c-0.39,22.853) 0.066,22.731 ; 0.038,23.063 cw(c-0.172,22.853) 0.125,22.853 ; 0.038,23.063 cw(c-0.172,22.853) 0.125,22.853 ; 0.038,23.063 cw(c-0.172,22.853) 0.125,22.853 ; 0.088,39.762 ccw(c-0.363,40.213) 0.275,40.213 ; 0.088,39.762 ccw(c-0.363,40.213) 0.275,40.213 ; 0.088,39.762 ccw(c-0.363,40.213) 0.275,40.213 ; 0.125,22.853 cw(c0.422,22.853) 0.212,23.063 ; 0.125,22.853 cw(c0.422,22.853) 0.212,23.063 ; 0.125,22.853 cw(c0.422,22.853) 0.212,23.063 ; 0.188,40.863 cw(c-0.022,40.653) 0.275,40.653 ; 0.188,40.863 cw(c-0.022,40.653) 0.275,40.653 ; 0.188,40.863 cw(c-0.022,40.653) 0.275,40.653 ; 0.212,23.063 cw(c0.422,22.853) 0.422,23.15 ; 0.212,23.063 cw(c0.422,22.853) 0.422,23.15 ; 0.212,23.063 cw(c0.422,22.853) 0.422,23.15 ; 0.212,23.237 ccw(c0.422,23.447) 0.422,23.15 ; 0.212,23.237 ccw(c0.422,23.447) 0.422,23.15 ; 0.212,23.237 ccw(c0.422,23.447) 0.422,23.15 ; 0.219,39.989 ccw(c0.372,39.901) 0.256,39.768 ; 0.219,39.989 ccw(c0.372,39.901) 0.256,39.768 ; 0.219,39.989 ccw(c0.372,39.901) 0.256,39.768 ; 0.262,39.588 cw(c0.472,39.378) 0.472,39.675 ; 0.262,39.588 cw(c0.472,39.378) 0.472,39.675 ; 0.262,39.588 cw(c0.472,39.378) 0.472,39.675 ; 0.262,39.762 ccw(c0.472,39.972) 0.472,39.675 ; 0.262,39.762 ccw(c0.472,39.972) 0.472,39.675 ; 0.262,39.762 ccw(c0.472,39.972) 0.472,39.675 ; 0.275,40.653 cw(c0.572,40.653) 0.362,40.863 ; 0.275,40.653 cw(c0.572,40.653) 0.362,40.863 ; 0.275,40.653 cw(c0.572,40.653) 0.362,40.863 ; 0.803,39.675 cw(c0.803,39.378) 1.013,39.588 ; 0.803,39.675 ccw(c0.803,39.972) 1.013,39.762 ; 0.803,39.675 cw(c0.803,39.378) 1.013,39.588 ; 0.803,39.675 ccw(c0.803,39.972) 1.013,39.762 ; 0.803,39.675 cw(c0.803,39.378) 1.013,39.588 ; 0.803,39.675 ccw(c0.803,39.972) 1.013,39.762 ; 0.828,23.15 ccw(c0.828,23.447) 1.038,23.237 ; 0.828,23.15 cw(c0.828,22.853) 1.038,23.063 ; 0.828,23.15 ccw(c0.828,23.447) 1.038,23.237 ; 0.828,23.15 cw(c0.828,22.853) 1.038,23.063 ; 0.828,23.15 ccw(c0.828,23.447) 1.038,23.237 ; 0.828,23.15 cw(c0.828,22.853) 1.038,23.063 ; 1.368,23.982 ccw(c2.175,24.79) 2.175,23.648 ; 1.368,23.982 ccw(c2.175,24.79) 2.175,23.648 ; 1.368,23.982 ccw(c2.175,24.79) 2.175,23.648 ; 1.642,23.791 cw(c1.46,23.112) 2.068,23.464 ; 1.642,23.791 cw(c1.46,23.112) 2.068,23.464 ; 1.642,23.791 cw(c1.46,23.112) 2.068,23.464 ; 1.709,26.016 ccw(c2.175,26.482) 2.175,25.823 ; 1.709,26.016 ccw(c2.175,26.482) 2.175,25.823 ; 1.709,26.016 ccw(c2.175,26.482) 2.175,25.823 ; 1.801,23.549 ccw(c2.175,23.923) 2.175,23.394 ; 1.801,23.549 ccw(c2.175,23.923) 2.175,23.394 ; 1.801,23.549 ccw(c2.175,23.923) 2.175,23.394 ; 1.818,26.775 ccw(c1.818,27.157) 2.088,26.887 ; 1.818,26.775 ccw(c1.818,27.157) 2.088,26.887 ; 1.818,26.775 ccw(c1.818,27.157) 2.088,26.887 ; 1.878,23.525 ccw(c1.878,23.822) 2.088,23.612 ; 1.878,23.525 cw(c1.878,23.228) 2.088,23.438 ; 1.878,23.525 ccw(c1.878,23.822) 2.088,23.612 ; 1.878,23.525 cw(c1.878,23.228) 2.088,23.438 ; 1.878,23.525 ccw(c1.878,23.822) 2.088,23.612 ; 1.878,23.525 cw(c1.878,23.228) 2.088,23.438 ; 1.988,22.337 ccw(c1.537,22.788) 2.175,22.788 ; 1.988,22.337 ccw(c1.537,22.788) 2.175,22.788 ; 1.988,22.337 ccw(c1.537,22.788) 2.175,22.788 ; 2.088,23.438 cw(c1.878,23.228) 2.175,23.228 ; 2.088,23.438 cw(c1.878,23.228) 2.175,23.228 ; 2.088,23.438 cw(c1.878,23.228) 2.175,23.228 ; 2.119,22.564 ccw(c2.272,22.476) 2.156,22.343 ; 2.119,22.564 ccw(c2.272,22.476) 2.156,22.343 ; 2.119,22.564 ccw(c2.272,22.476) 2.156,22.343 ; 2.162,22.163 cw(c2.372,21.953) 2.372,22.25 ; 2.162,22.163 cw(c2.372,21.953) 2.372,22.25 ; 2.162,22.163 cw(c2.372,21.953) 2.372,22.25 ; 2.162,22.337 ccw(c2.372,22.547) 2.372,22.25 ; 2.162,22.337 ccw(c2.372,22.547) 2.372,22.25 ; 2.162,22.337 ccw(c2.372,22.547) 2.372,22.25 ; 2.175,23.228 cw(c2.472,23.228) 2.262,23.438 ; 2.175,23.228 cw(c2.472,23.228) 2.262,23.438 ; 2.175,23.228 cw(c2.472,23.228) 2.262,23.438 ; 2.703,22.25 ccw(c2.703,22.547) 2.913,22.337 ; 2.703,22.25 cw(c2.703,21.953) 2.913,22.163 ; 2.703,22.25 ccw(c2.703,22.547) 2.913,22.337 ; 2.703,22.25 cw(c2.703,21.953) 2.913,22.163 ; 2.703,22.25 ccw(c2.703,22.547) 2.913,22.337 ; 2.703,22.25 cw(c2.703,21.953) 2.913,22.163 ; 60.912,42.413 cw(c61.122,42.203) 61.122,42.5 ; 60.912,42.413 cw(c61.122,42.203) 61.122,42.5 ; 60.912,42.413 cw(c61.122,42.203) 61.122,42.5 ; 60.912,42.587 ccw(c61.122,42.797) 61.122,42.5 ; 60.912,42.587 ccw(c61.122,42.797) 61.122,42.5 ; 60.912,42.587 ccw(c61.122,42.797) 61.122,42.5 ; 61.412,25.588 cw(c61.622,25.378) 61.622,25.675 ; 61.412,25.588 cw(c61.622,25.378) 61.622,25.675 ; 61.412,25.588 cw(c61.622,25.378) 61.622,25.675 ; 61.412,25.762 ccw(c61.622,25.972) 61.622,25.675 ; 61.412,25.762 ccw(c61.622,25.972) 61.622,25.675 ; 61.412,25.762 ccw(c61.622,25.972) 61.622,25.675 ; 61.453,42.5 ccw(c61.453,42.797) 61.663,42.587 ; 61.453,42.5 cw(c61.453,42.203) 61.663,42.413 ; 61.453,42.5 ccw(c61.453,42.797) 61.663,42.587 ; 61.453,42.5 cw(c61.453,42.203) 61.663,42.413 ; 61.453,42.5 ccw(c61.453,42.797) 61.663,42.587 ; 61.453,42.5 cw(c61.453,42.203) 61.663,42.413 ; 61.563,41.312 ccw(c61.353,41.522) 61.65,41.522 ; 61.563,41.312 ccw(c61.353,41.522) 61.65,41.522 ; 61.563,41.312 ccw(c61.353,41.522) 61.65,41.522 ; 61.65,38.927 cw(c61.65,38.268) 62.116,38.734 ; 61.65,38.927 cw(c61.65,38.268) 62.116,38.734 ; 61.65,38.927 cw(c61.65,38.268) 62.116,38.734 ; 61.65,41.102 cw(c61.65,39.96) 62.457,40.768 ; 61.65,41.102 cw(c61.65,39.96) 62.457,40.768 ; 61.65,41.102 cw(c61.65,39.96) 62.457,40.768 ; 61.65,41.356 cw(c61.65,40.827) 62.024,41.201 ; 61.65,41.356 cw(c61.65,40.827) 62.024,41.201 ; 61.65,41.356 cw(c61.65,40.827) 62.024,41.201 ; 61.65,41.522 ccw(c61.947,41.522) 61.737,41.312 ; 61.65,41.522 ccw(c61.947,41.522) 61.737,41.312 ; 61.65,41.522 ccw(c61.947,41.522) 61.737,41.312 ; 61.65,41.962 cw(c62.288,41.962) 61.837,42.413 ; 61.65,41.962 cw(c62.288,41.962) 61.837,42.413 ; 61.65,41.962 cw(c62.288,41.962) 61.837,42.413 ; 61.669,42.407 cw(c61.553,42.274) 61.706,42.186 ; 61.669,42.407 cw(c61.553,42.274) 61.706,42.186 ; 61.669,42.407 cw(c61.553,42.274) 61.706,42.186 ; 61.737,37.863 cw(c62.007,37.593) 62.007,37.975 ; 61.737,37.863 cw(c62.007,37.593) 62.007,37.975 ; 61.737,37.863 cw(c62.007,37.593) 62.007,37.975 ; 61.737,41.138 cw(c61.947,40.928) 61.947,41.225 ; 61.737,41.138 cw(c61.947,40.928) 61.947,41.225 ; 61.737,41.138 cw(c61.947,40.928) 61.947,41.225 ; 61.737,41.312 ccw(c61.947,41.522) 61.947,41.225 ; 61.737,41.312 ccw(c61.947,41.522) 61.947,41.225 ; 61.737,41.312 ccw(c61.947,41.522) 61.947,41.225 ; 61.757,41.287 ccw(c62.365,41.638) 62.183,40.959 ; 61.757,41.287 ccw(c62.365,41.638) 62.183,40.959 ; 61.757,41.287 ccw(c62.365,41.638) 62.183,40.959 ; 61.953,25.675 cw(c61.953,25.378) 62.163,25.588 ; 61.953,25.675 ccw(c61.953,25.972) 62.163,25.762 ; 61.953,25.675 cw(c61.953,25.378) 62.163,25.588 ; 61.953,25.675 ccw(c61.953,25.972) 62.163,25.762 ; 61.953,25.675 cw(c61.953,25.378) 62.163,25.588 ; 61.953,25.675 ccw(c61.953,25.972) 62.163,25.762 ; 62.063,24.487 ccw(c61.853,24.697) 62.15,24.697 ; 62.063,24.487 ccw(c61.853,24.697) 62.15,24.697 ; 62.063,24.487 ccw(c61.853,24.697) 62.15,24.697 ; 62.15,22.102 cw(c62.15,21.443) 62.616,21.909 ; 62.15,22.102 cw(c62.15,21.443) 62.616,21.909 ; 62.15,22.102 cw(c62.15,21.443) 62.616,21.909 ; 62.15,24.277 cw(c62.15,23.135) 62.957,23.943 ; 62.15,24.277 cw(c62.15,23.135) 62.957,23.943 ; 62.15,24.277 cw(c62.15,23.135) 62.957,23.943 ; 62.15,24.531 cw(c62.15,24.002) 62.524,24.376 ; 62.15,24.531 cw(c62.15,24.002) 62.524,24.376 ; 62.15,24.531 cw(c62.15,24.002) 62.524,24.376 ; 62.15,24.697 ccw(c62.447,24.697) 62.237,24.487 ; 62.15,24.697 ccw(c62.447,24.697) 62.237,24.487 ; 62.15,24.697 ccw(c62.447,24.697) 62.237,24.487 ; 62.15,25.137 cw(c62.788,25.137) 62.337,25.588 ; 62.15,25.137 cw(c62.788,25.137) 62.337,25.588 ; 62.15,25.137 cw(c62.788,25.137) 62.337,25.588 ; 62.169,25.582 cw(c62.053,25.449) 62.206,25.361 ; 62.169,25.582 cw(c62.053,25.449) 62.206,25.361 ; 62.169,25.582 cw(c62.053,25.449) 62.206,25.361 ; 62.237,21.038 cw(c62.507,20.768) 62.507,21.15 ; 62.237,21.038 cw(c62.507,20.768) 62.507,21.15 ; 62.237,21.038 cw(c62.507,20.768) 62.507,21.15 ; 62.237,24.313 cw(c62.447,24.103) 62.447,24.4 ; 62.237,24.313 cw(c62.447,24.103) 62.447,24.4 ; 62.237,24.313 cw(c62.447,24.103) 62.447,24.4 ; 62.237,24.487 ccw(c62.447,24.697) 62.447,24.4 ; 62.237,24.487 ccw(c62.447,24.697) 62.447,24.4 ; 62.237,24.487 ccw(c62.447,24.697) 62.447,24.4 ; 62.257,24.462 ccw(c62.865,24.813) 62.683,24.134 ; 62.257,24.462 ccw(c62.865,24.813) 62.683,24.134 ; 62.257,24.462 ccw(c62.865,24.813) 62.683,24.134 ; 62.787,41.513 cw(c62.997,41.303) 62.997,41.6 ; 62.787,41.513 cw(c62.997,41.303) 62.997,41.6 ; 62.787,41.513 cw(c62.997,41.303) 62.997,41.6 ; 62.787,41.687 ccw(c62.997,41.897) 62.997,41.6 ; 62.787,41.687 ccw(c62.997,41.897) 62.997,41.6 ; 62.787,41.687 ccw(c62.997,41.897) 62.997,41.6 ; 63.287,24.688 cw(c63.497,24.478) 63.497,24.775 ; 63.287,24.688 cw(c63.497,24.478) 63.497,24.775 ; 63.287,24.688 cw(c63.497,24.478) 63.497,24.775 ; 63.287,24.862 ccw(c63.497,25.072) 63.497,24.775 ; 63.287,24.862 ccw(c63.497,25.072) 63.497,24.775 ; 63.287,24.862 ccw(c63.497,25.072) 63.497,24.775 ; 63.403,41.6 ccw(c63.403,41.897) 63.613,41.687 ; 63.403,41.6 cw(c63.403,41.303) 63.613,41.513 ; 63.403,41.6 ccw(c63.403,41.897) 63.613,41.687 ; 63.403,41.6 cw(c63.403,41.303) 63.613,41.513 ; 63.403,41.6 ccw(c63.403,41.897) 63.613,41.687 ; 63.403,41.6 cw(c63.403,41.303) 63.613,41.513 ; 63.613,41.513 cw(c62.799,40.699) 63.95,40.699 ; 63.613,41.513 cw(c62.799,40.699) 63.95,40.699 ; 63.613,41.513 cw(c62.799,40.699) 63.95,40.699 ; 63.613,41.687 ccw(c63.403,41.897) 63.7,41.897 ; 63.613,41.687 ccw(c63.403,41.897) 63.7,41.897 ; 63.613,41.687 ccw(c63.403,41.897) 63.7,41.897 ; 63.7,41.798 cw(c65.127,41.798) 64.118,42.807 ; 63.7,41.798 cw(c65.127,41.798) 64.118,42.807 ; 63.7,41.798 cw(c65.127,41.798) 64.118,42.807 ; 63.7,41.897 ccw(c63.997,41.897) 63.787,41.687 ; 63.7,41.897 ccw(c63.997,41.897) 63.787,41.687 ; 63.7,41.897 ccw(c63.997,41.897) 63.787,41.687 ; 63.7,42.411 cw(c64.514,42.411) 63.938,42.987 ; 63.7,42.411 cw(c64.514,42.411) 63.938,42.987 ; 63.7,42.411 cw(c64.514,42.411) 63.938,42.987 ; 63.744,42.796 cw(c63.48,42.498) 63.825,42.299 ; 63.744,42.796 cw(c63.48,42.498) 63.825,42.299 ; 63.744,42.796 cw(c63.48,42.498) 63.825,42.299 ; 63.759,42.019 ccw(c64.215,41.897) 63.807,41.662 ; 63.759,42.019 ccw(c64.215,41.897) 63.807,41.662 ; 63.759,42.019 ccw(c64.215,41.897) 63.807,41.662